# Altium PCB PCB_RGB2HDMI_2022-10-02_beta3.pcbdoc (part 1 of 4)
Units mil, origin at the board's own origin, x right, y up, seen from the top; angles counter-clockwise.
Board outline 5558.95 x 3224.07 mil, 2 copper layers (Top Layer, Bottom Layer); 47 components, 54 nets, 201 pads, 161 vias.
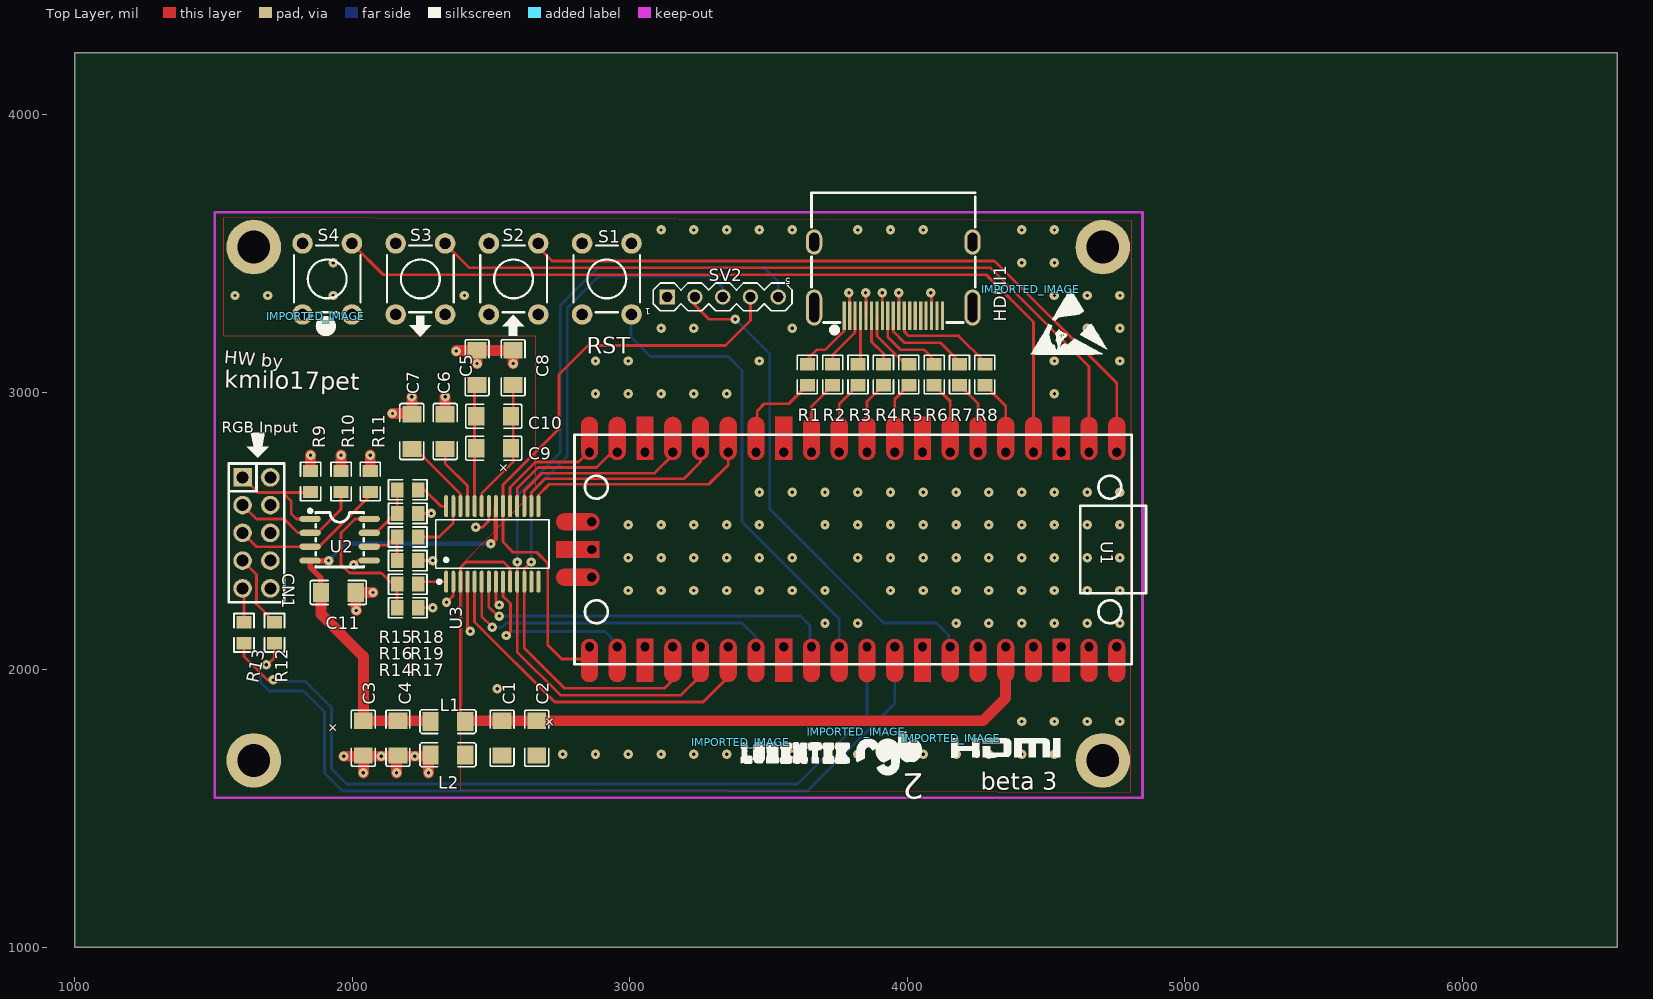
[diagram p0: Top Layer view]
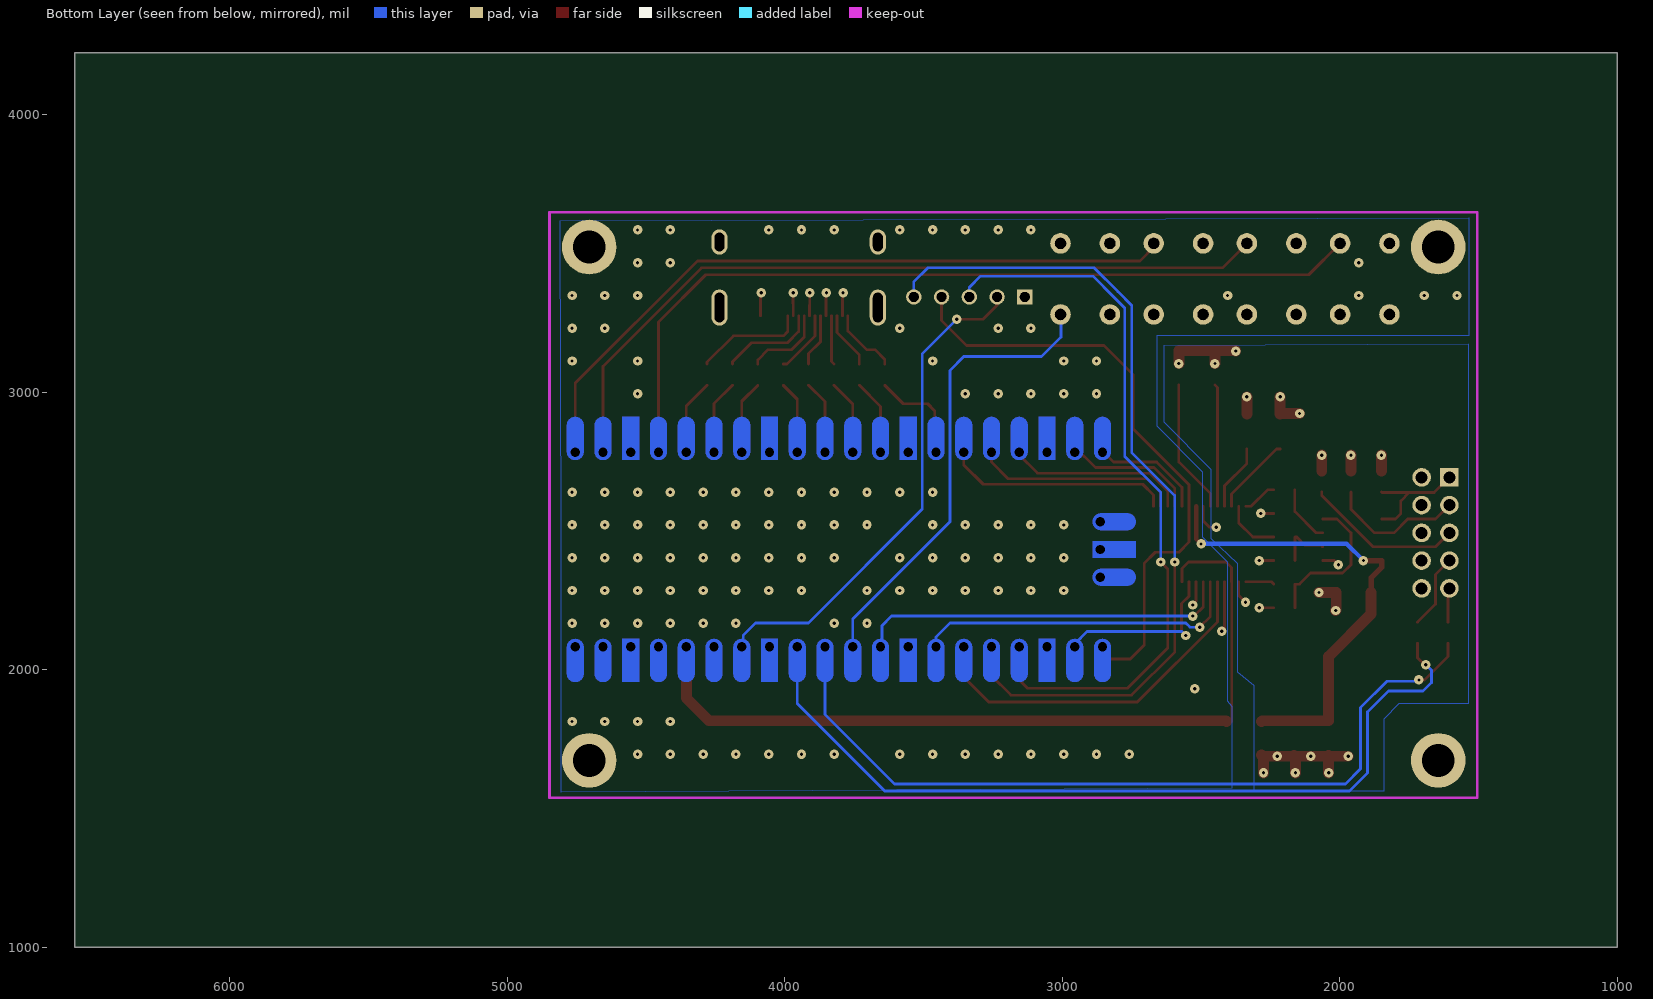
[diagram p1: Bottom Layer view, seen from below]

## Layer stack, top to bottom
Top Layer: signal copper (thickness not stored)
Dielectric: dielectric 12.6, FR-4, Dk 4.8
Bottom Layer: signal copper (thickness not stored)

## Board outline
6558.95,1000 1000,1000 1000,4224.07 6558.95,4224.07

## Components (designator, comment, footprint, x,y, rotation, side; value= is the part's Value field where it differs from the comment)
C1 "100nf" C1206 2540,1753.83 r90 top
C2 "10uF" C1206 2665,1753.83 r270 top
C3 "10uF" C1206 2040,1753.83 r270 top
C4 "100nf" C1206 2165,1753.83 r90 top
C5 "100nF" C1206 2450,3088.83 r270 top
C6 "100nF" C1206 2335,2858.83 r90 top
C7 "100nF" C1206 2215,2858.83 r90 top
C8 "100nF" C1206 2580,3088.83 r270 top
C9 "1uF" C1206 2510,2798.83 r180 top
C10 "10nF" C1206 2510,2913.83 r180 top
C11 "100nf" C1206 1950,2278.83 r180 top
CN1 "RGB-SYNC" HDR-TH_10P-P2.54-V-M-R2-C5-S2.54 1655,2493.83 r270 top
HDMI1 "HDMI 19PIN 043" HDMI-SMD_HDMI-9PIN-043 3950,3408.83 r180 top
IMPORTED_IMAGE "IMPORTED_IMAGE" IMPORTED_IMAGE 1869.57,3274.2 r0 top
IMPORTED_IMAGE "IMPORTED_IMAGE" IMPORTED_IMAGE 4444.76,3372.33 r0 top
IMPORTED_IMAGE "IMPORTED_IMAGE" IMPORTED_IMAGE 3816.9,1777.49 r0 top
IMPORTED_IMAGE "IMPORTED_IMAGE" IMPORTED_IMAGE 4158.15,1753.83 r0 top
IMPORTED_IMAGE "IMPORTED_IMAGE" IMPORTED_IMAGE 3399.57,1739.98 r0 top
L1 "HF filter" L1206 2345,1813.83 r180 top
L2 "HF filter" L1206 2345,1693.83 r180 top
R1 "270" R0805 3640,3063.83 r90 top
R2 "270" R0805 3731.43,3063.83 r90 top
R3 "270" R0805 3822.86,3063.83 r90 top
R4 "270" R0805 3914.29,3063.83 r90 top
R5 "270" R0805 4005.71,3063.83 r90 top
R6 "270" R0805 4097.14,3063.83 r90 top
R7 "270" R0805 4188.57,3063.83 r90 top
R8 "270" R0805 4280,3063.83 r90 top
R9 "75" R0805 1850,2678.83 r90 top
R10 "75" R0805 1960,2678.83 r90 top
R11 "75" R0805 2065,2678.83 r90 top
R12 "48" R0805 1720,2133.83 r270 top
R13 "48" R0805 1610,2133.83 r270 top
R14 "50" R0805 2200,2308.83 r0 top
R15 "50" R0805 2200,2648.83 r0 top
R16 "50" R0805 2200,2478.83 r0 top
R17 "50" R0805 2200,2223.83 r0 top
R18 "50" R0805 2200,2563.83 r0 top
R19 "50" R0805 2200,2393.83 r0 top
S1 "RESET" SPARKFUN-SWITCHES_TACTILE_SWITCH_PTH_6.0MM 2917.5,3408.83 r90 top
S2 "Up" SPARKFUN-SWITCHES_TACTILE_SWITCH_PTH_6.0MM 2581.67,3408.83 r270 top
S3 "Down" SPARKFUN-SWITCHES_TACTILE_SWITCH_PTH_6.0MM 2245.83,3408.83 r270 top
S4 "Action" SPARKFUN-SWITCHES_TACTILE_SWITCH_PTH_6.0MM 1910,3408.83 r270 top
SV2 "SPI Expansion" CON-LSTB_MA05-1 3335,3343.83 r0 top
U1 "RPI PICO" RASPBERRY-PI-PICO 3805,2433.83 r270 top
U2 "THS7316DR" SOIC-8_L5.0-W4.0-P1.27-LS6.1-BL 1955,2468.83 r270 top
U3 "AFE" SSOP-28_L10.2-W5.3-P0.65-LS7.8-BL 2505,2453.83 r0 top

## Footprints (in the part's own frame and the unit in brackets; to place one, negate y for a bottom-side part, rotate by r counter-clockwise, add the part's x,y. Pads: shape width x height; smd on the part's side, far side on the other; paste and mask are expansions set on the pad)
C1206 [mm]
  rect 1.485x1.728 smd: 1(-1.593,0) 2(1.593,0)
  silkscreen extent -2.56,-1.09 2.56,1.09
CON-LSTB_MA05-1 [mil]
  rect 55.43x55.43 hole 35.44 slot 35.45 at 90 deg: 1(-200,0)
  round 55.43 hole 35.44 slot 35.45 at 90 deg: 2(-100,0) 3(0,0) 4(100,0) 5(200,0)
  silkscreen extent -250,-50 250,50
HDMI-SMD_HDMI-9PIN-043 [mm]
  rect 0.3x2.6 smd: 1(4.5,3.38) 2(4,3.38) 3(3.5,3.38) 4(3,3.38) 5(2.5,3.38) 6(2,3.38) 7(1.5,3.38) 8(1,3.38) 9(0.5,3.38) 10(0,3.38) 11(-0.5,3.38) 12(-1,3.38) 13(-1.5,3.38) 14(-2,3.38) 15(-2.5,3.38) 16(-3,3.38) 17(-3.5,3.38) 18(-4,3.38) 19(-4.5,3.38)
  oval 1.5x2.3 hole 0.9 slot 1.7 at 90 deg: 20(-7.25,-3.38) 20(7.25,-3.38)
  oval 1.5x3.3 hole 0.9 slot 2.7 at 90 deg: 20(-7.25,2.62) 20(7.25,2.62)
  silkscreen extent -7.5,-7.88 7.5,4.92
HDR-TH_10P-P2.54-V-M-R2-C5-S2.54 [mm]
  rect 1.7x1.7 hole 1.1: 1(-5.08,-1.27)
  round 1.7 hole 1.1: 2(-5.08,1.27) 3(-2.54,-1.27) 4(-2.54,1.27) 5(0,-1.27) 6(0,1.27) 7(2.54,-1.27) 8(2.54,1.27) 9(5.08,-1.27) 10(5.08,1.27)
  silkscreen extent -6.35,-2.54 6.35,2.54
IMPORTED_IMAGE [mil]
  silkscreen extent 0,-71 71,0
L1206 [mm]
  rect 1.485x1.728 smd: 1(-1.593,0) 2(1.593,0)
  silkscreen extent -2.56,-1.09 2.56,1.09
R0805 [mil]
  rect 44.59x54.21 smd: 1(-38.04,0) 2(38.04,0)
  silkscreen extent -69,-36 69,36